# Altium PCB X-DO10 RFID_V1.0..PcbDoc (part 1 of 3)
Units mm, origin at the board's own origin, x right, y up, seen from the top; angles counter-clockwise.
Board outline 1582.55 x 1344.17 mm, 2 copper layers (Top Layer, Bottom Layer); 182 components, 148 nets, 511 pads, 172 vias.
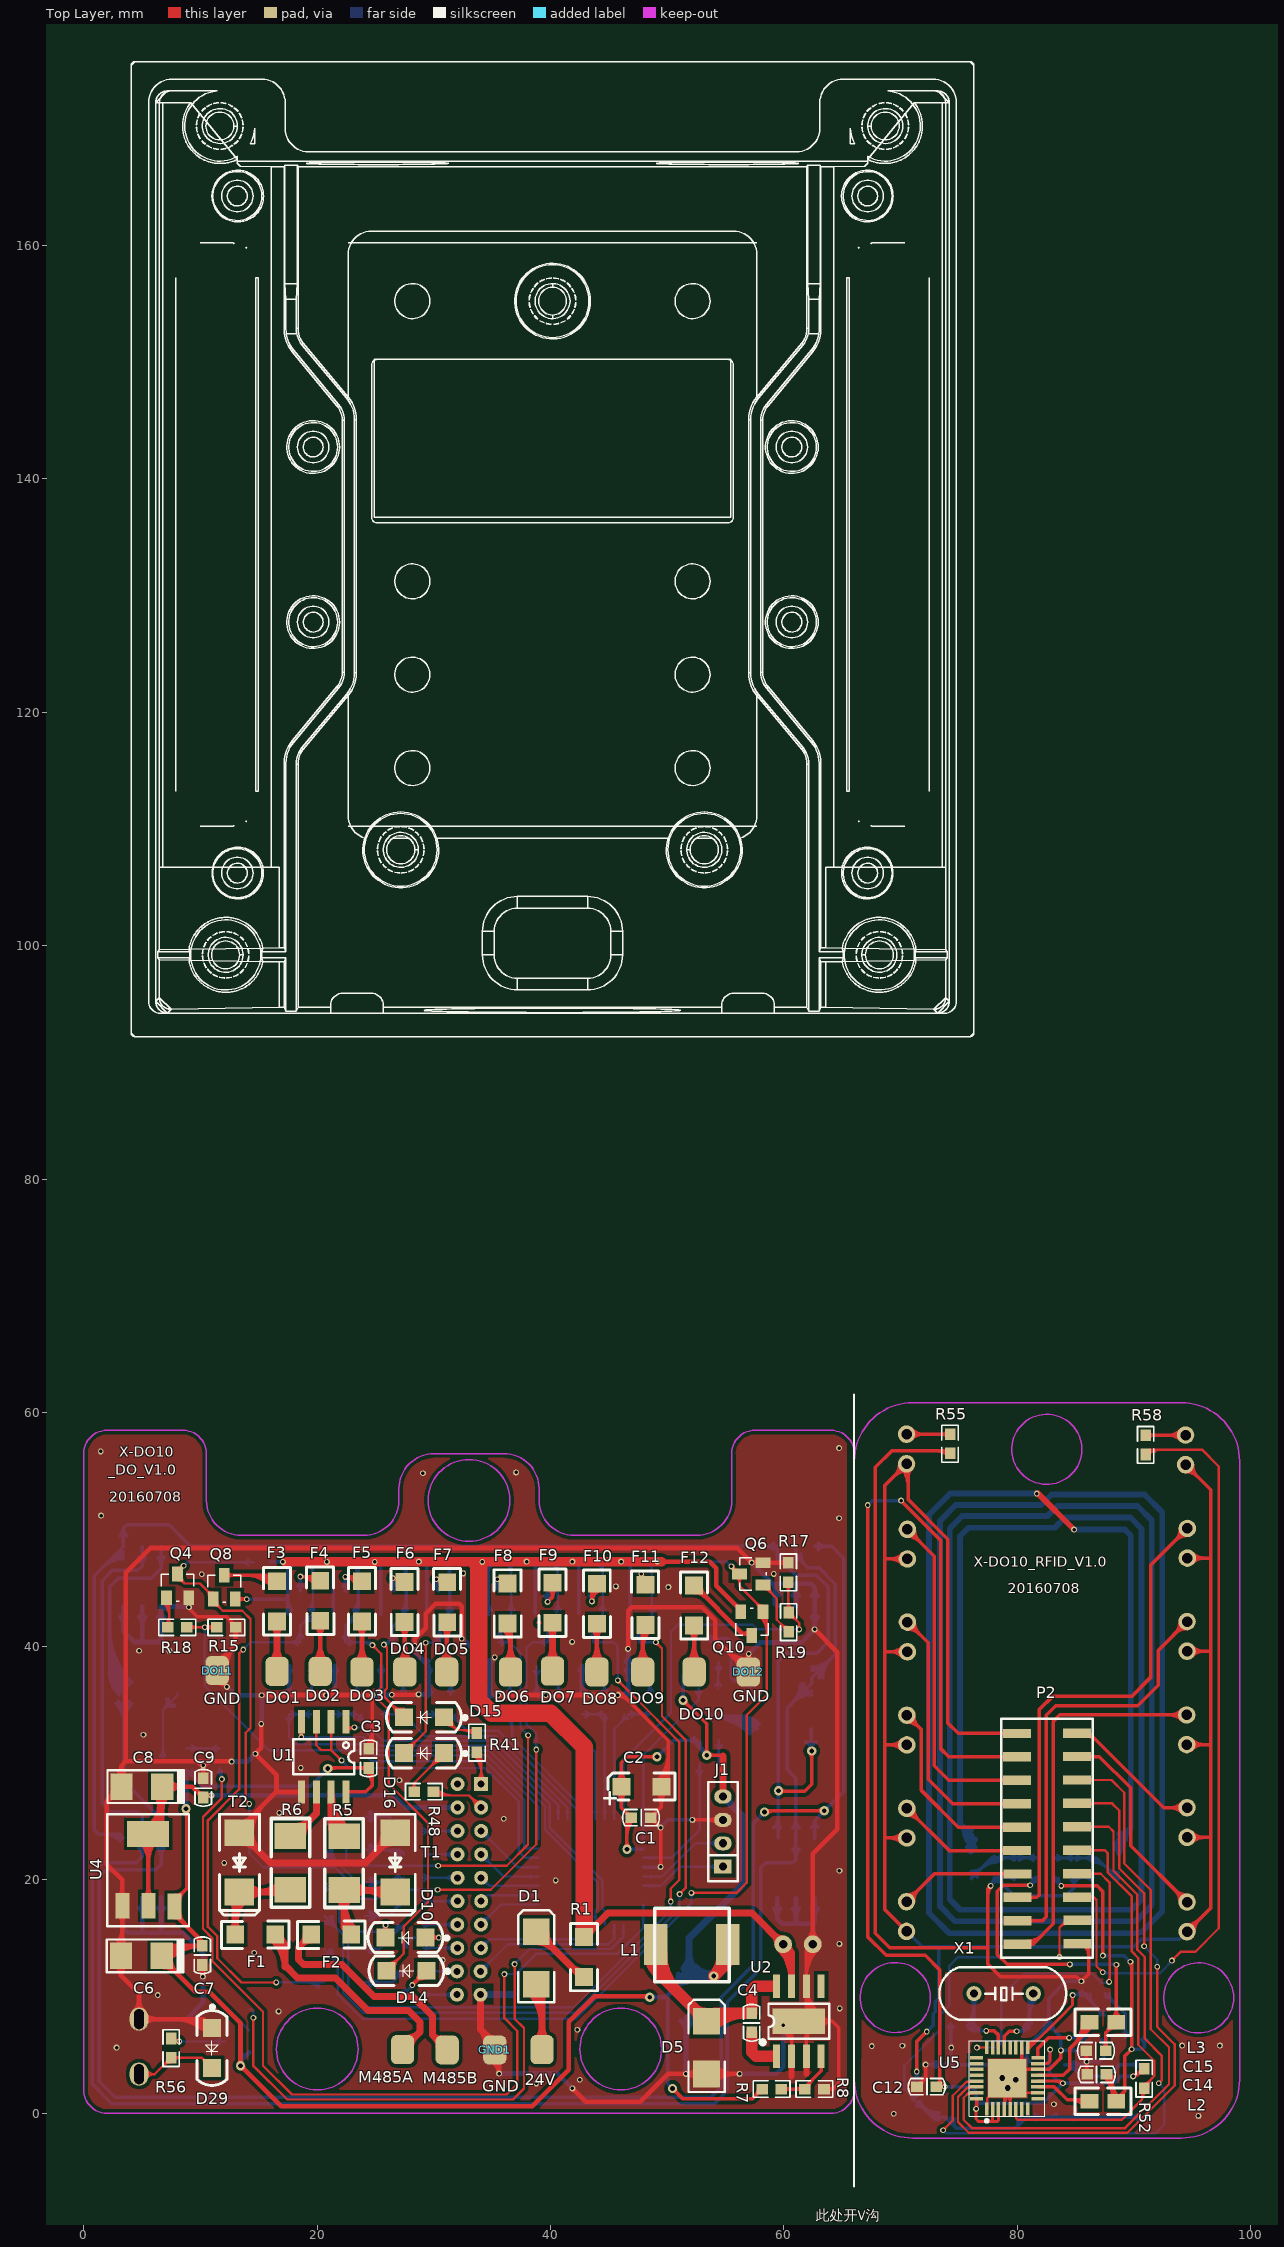
[diagram p0: Top Layer view]
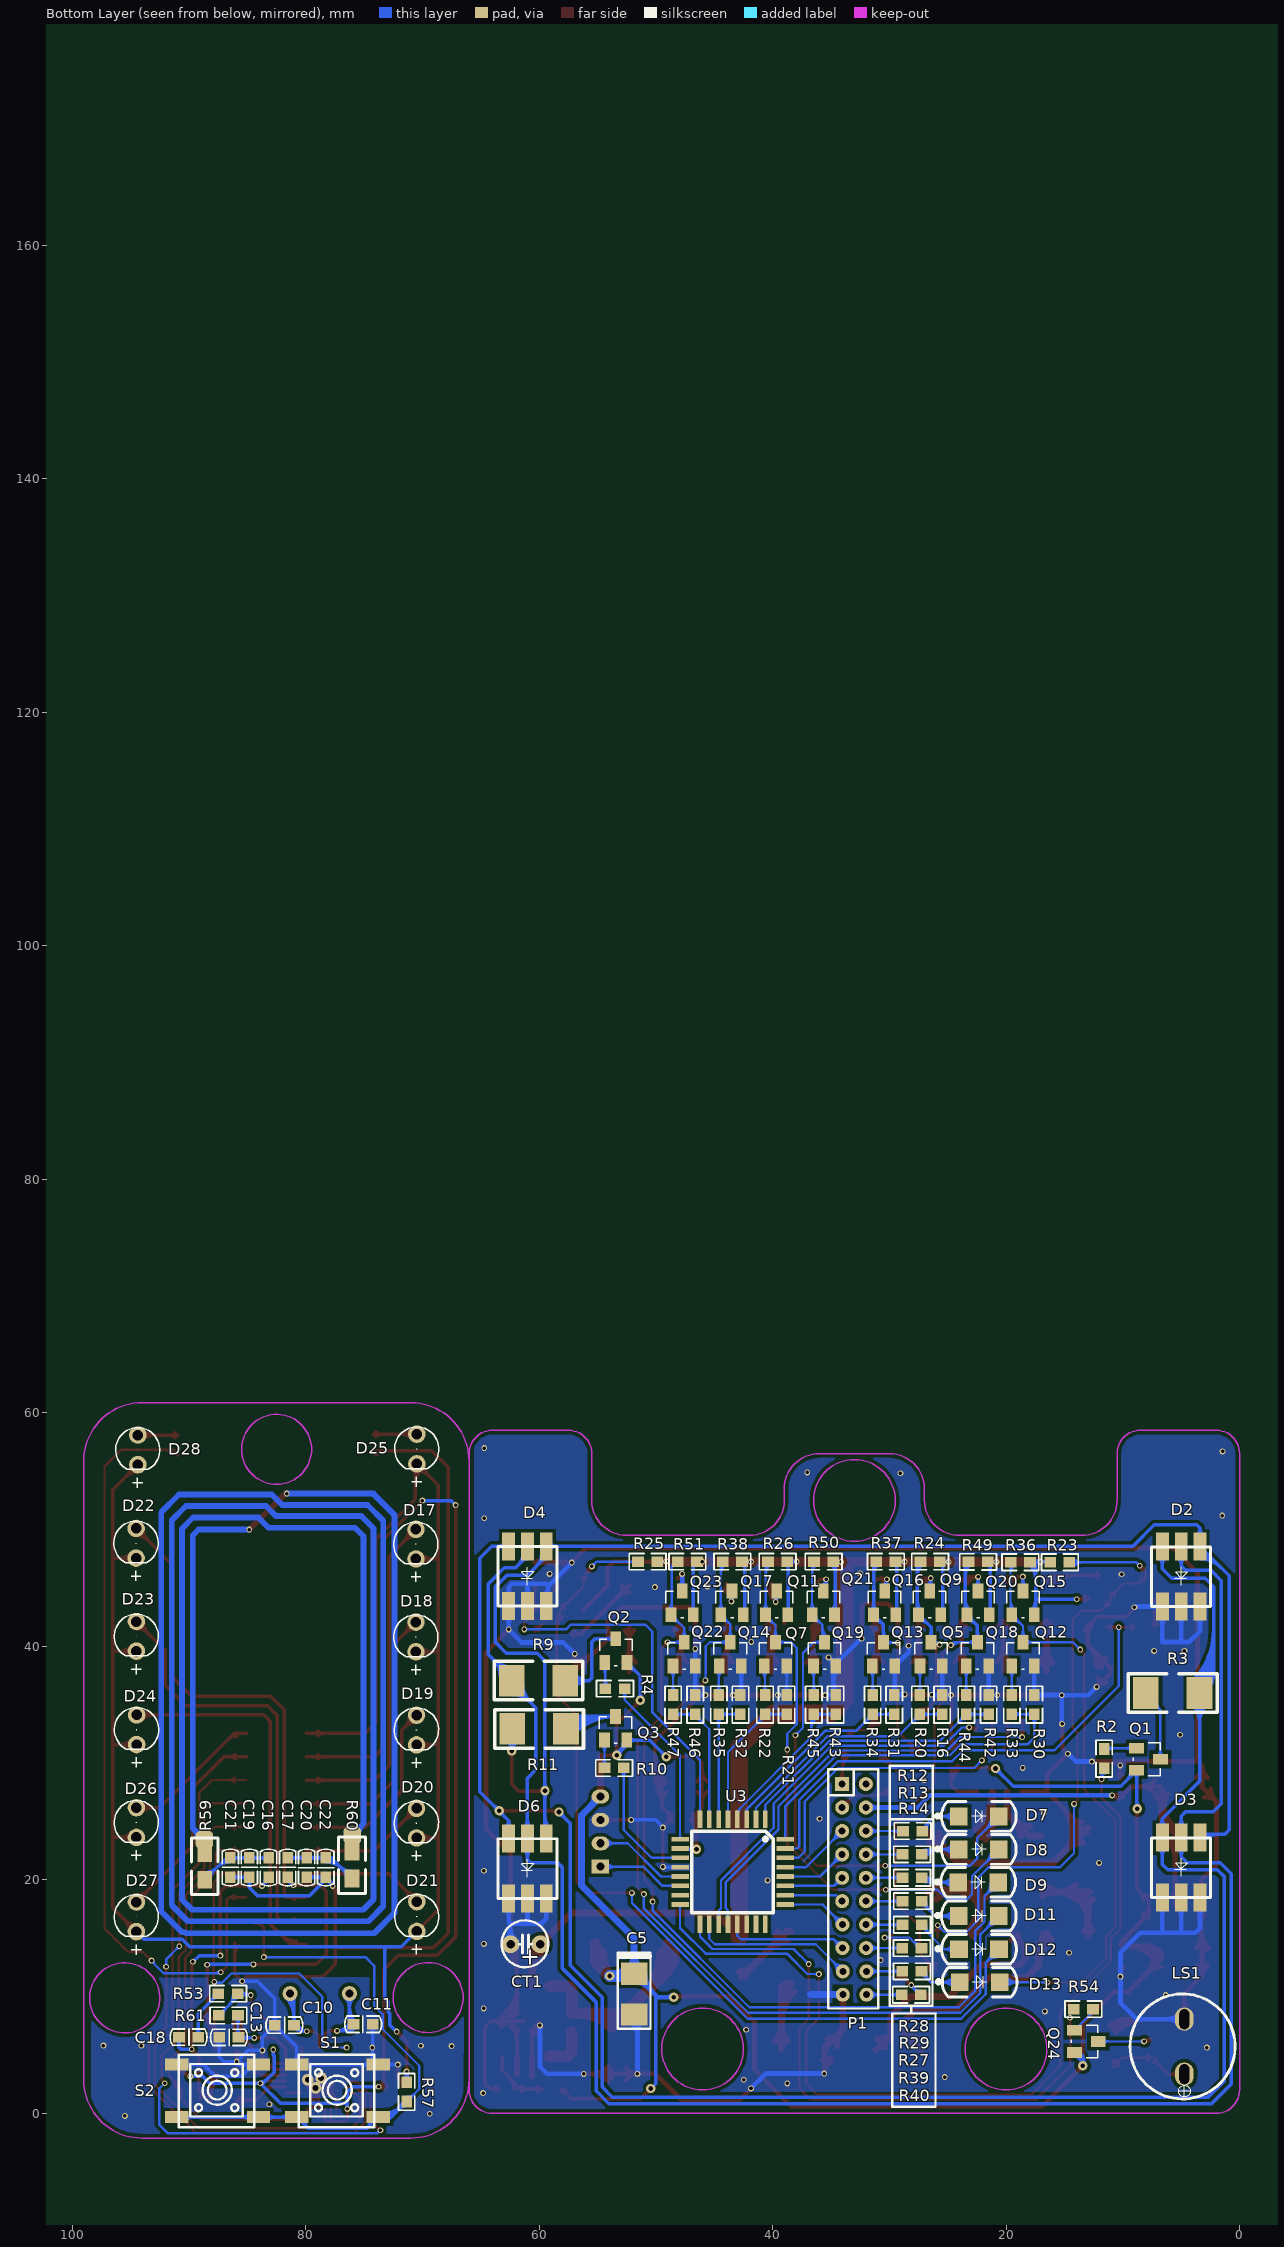
[diagram p1: Bottom Layer view, seen from below]

## Layer stack, top to bottom
Top Layer: signal copper 0.0356
Dielectric: dielectric 0.32, FR-4, Dk 4.8
Bottom Layer: signal copper 0.0356

## Board outline
-703.671,470.988 871.129,470.988 873.034,472.893 873.034,-867.465 874.939,-869.37 -705.703,-869.37 -707.608,-871.275

## Design rules (kind name [scope] priority, off if disabled: settings)
Clearance Clearance_GND [inpolygon] p1: gap=0.3
Clearance [All] p2: gap=0.2
PlaneClearance [All] p1: clearance=0.3
PolygonConnect [Isvia or Ispad] p1: connectstyle=Direct reliefconductorwidth=0.254 reliefentries=4 polygonreliefangle="90 Angle" airgapwidth=0.254
RoutingVias [All] p1: holewidth=0.3 width=0.5 viastyle="Through Hole" minholewidth=0.3 minwidth=0.5 maxholewidth=0.4 maxwidth=0.8
SilkToSolderMaskClearance SilkscreenOverComponentPads [IsPad] p1: minsilkscreentomaskgap=0.254 clearancetoexposedcopper=TRUE
SolderMaskExpansion [All] p1: expansion=0.102
Width [All] p1: maxlimit=1.5 minlimit=0.2 preferedwidth=0.2 minimp=50.000000 maximp=50.000000 favimp=50.000000
26 further rules are at their usual default settings.

## Classes and differential pairs
component class X-DO10_V1.0: 24V C1 C2 C3 C4 C5 C6 C7 C8 C9 CT1 D1 D2 D3 D4 D5 D6 D7 D8 D9 D10 D11 D12 D13 D14 D15 D16 D29 DO1 DO2 DO3 DO4 DO5 DO6 DO7 DO8 DO9 DO10 DO11 DO12 F1 F2 F3 F4 F5 F6 F7 F8 F9 F10 F11 F12 GND1 J1 L1 LS1 M485A M485B P1 Q1 Q2 Q3 Q4 Q5 Q6 Q7 Q8 Q9 Q10 Q11 Q12 Q13 Q14 Q15 Q16 Q17 Q18 Q19 Q20 Q21 Q22 Q23 Q24 R1 R2 R3 R4 R5 R6 R7 R8 R9 R10 R11 R12 R13 R14 R15 R16 R17 R18 R19 R20 R21 R22 R23 R24 R25 R26 R27 R28 R29 R30 R31 R32 R33 R34 R35 R36 R37 R38 R39 R40 R41 R42 R43 R44 R45 R46 R47 R48 R49 R50 R51 R56 R61 RD T1 T2 TD U1 U2 U3 U4
component class "X-DO10 RFID_LED_V1.0": C10 C11 C12 C13 C14 C15 C16 C17 C18 C19 C20 C21 C22 D17 D18 D19 D20 D21 D22 D23 D24 D25 D26 D27 D28 L2 L3 P2 R52 R53 R55 R57 R58 R59 R60 R61 S1 S2 U5 X1

## Components (designator, comment, footprint, x,y, rotation, side; value= is the part's Value field where it differs from the comment)
24V "焊盘" HOLE_SMD#1 39.275,5.45 r90 top (schematic designator 1)
C1 "" C0603 48.575,25.325 r180 top
C2 "" 1206C 46.075,27.975 r0 top
C3 "" C0603 24.425,31.225 r270 top
C4 "" C0603 57.225,6.925 r90 top
C5 "钽电容" CT3528 51.9,10.25 r270 bottom
C6 "33uF/16V" CT3528 5,13.5 r180 top
C7 "0.1uF" C0603 10.175,14.35 r270 top
C8 "33uF/16V" CT3528 5.05,28 r180 top
C9 "0.1uF" C0603 10.25,27.05 r90 top
C10 "15P" c0603 81.025,7.55 r0 bottom
C11 "15P" c0603 75.925,7.625 r180 bottom
C12 "104" c0603 73.05,2.275 r180 top
C13 "104" c0603 85.775,6.5 r0 bottom
C14 "47P" c0603 85.975,3.325 r0 top
C15 "47P" c0603 85.9,5.35 r0 top
C16 "15P" c0603 83.205,21.875 r270 bottom
C17 "15P" c0603 81.57,21.875 r270 bottom
C18 "104" c0603 89.225,6.525 r0 bottom
C19 "150P" c0603 84.84,21.875 r270 bottom
C20 "180P" c0603 79.935,20.225 r90 bottom
C21 "150P" c0603 86.475,21.875 r270 bottom
C22 "180P" c0603 78.3,20.225 r90 bottom
CT1 "铝电解电容" RB0.1 59.925,14.475 r0 bottom
D1 "" SMB 38.775,13.3 r90 top
D2 "5050RGB" 5050RGB 5.025,45.975 r90 bottom locked
D3 "5050RGB" 5050RGB 5.025,21.05 r90 bottom locked
D4 "5050RGB" 5050RGB 61.025,46 r90 bottom locked
D5 "" SMB 53.375,5.625 r90 top
D6 "5050RGB" 5050RGB 61.025,20.975 r90 bottom locked
D7 "" 1206d 24.075,25.425 r180 bottom
D8 "" 1206d 24.075,22.6 r180 bottom
D9 "" 1206d 24.125,19.775 r180 bottom
D10 "" 1206d 29.3,15.05 r180 top
D11 "" 1206d 24.075,16.9 r180 bottom
D12 "" 1206d 24.05,14.05 r180 bottom
D13 "" 1206d 24,11.225 r180 bottom
D14 "" 1206d 29.375,12.2 r180 top
D15 "" 1206d 30.875,33.925 r180 top
D16 "" 1206D 30.875,30.85 r180 top
D17 "黄色" LED-2.54-3 70.575,48.75 r90 bottom locked
D18 "黄色" LED-2.54-3 70.575,40.8 r90 bottom locked
D19 "黄色" LED-2.54-3 70.525,32.825 r90 bottom locked
D20 "黄色" LED-2.54-3 70.525,24.85 r90 bottom locked
D21 "黄色" LED-2.54-3 70.5,16.85 r90 bottom locked
D22 "黄色" LED-2.54-3 94.55,48.825 r90 bottom locked
D23 "黄色" LED-2.54-3 94.525,40.85 r90 bottom locked
D24 "黄色" LED-2.54-3 94.5,32.85 r90 bottom locked
D25 "红色" LED-2.54-3 70.5,56.9 r90 bottom locked
D26 "黄色" LED-2.54-3 94.525,24.9 r90 bottom locked
D27 "黄色" LED-2.54-3 94.525,16.825 r90 bottom locked
D28 "红色" LED-2.54-3 94.4,56.825 r90 bottom locked
D29 "4148" 1206D 11,7.3 r270 top
DO1 "焊盘" HOLE_SMD#2 16.575,37.85 r0 top
DO2 "焊盘" HOLE_SMD#1 20.275,37.85 r90 top
DO3 "焊盘" HOLE_SMD#1 23.85,37.8 r90 top
DO4 "焊盘" HOLE_SMD#1 27.525,37.8 r90 top
DO5 "焊盘" HOLE_SMD#1 31.1,37.8 r90 top
DO6 "焊盘" HOLE_SMD#1 36.575,37.8 r90 top
DO7 "焊盘" HOLE_SMD#1 40.175,37.875 r90 top
DO8 "焊盘" HOLE_SMD#1 43.975,37.8 r90 top
DO9 "焊盘" HOLE_SMD#1 47.9,37.8 r90 top
DO10 "焊盘" HOLE_SMD#1 52.3,37.8 r90 top
DO11 "GND" HOLE_SMD#2 11.45,37.925 r0 top
DO12 "GND" HOLE_SMD#2 56.95,37.8 r0 top (schematic designator DO9)
F1 "FSMD012-1206-R" 1206 14.7,15.3 r0 top
F2 "FSMD012-1206-R" 1206 21.225,15.3 r180 top
F3 "FSMD012-1206-R" 1206 16.575,43.85 r270 top
F4 "FSMD012-1206-R" 1206 20.275,43.9 r270 top
F5 "FSMD012-1206-R" 1206 23.85,43.85 r270 top
F6 "FSMD012-1206-R" 1206 27.5,43.8 r270 top
F7 "FSMD012-1206-R" 1206 31.15,43.775 r270 top
F8 "FSMD012-1206-R" 1206 36.325,43.675 r270 top
F9 "FSMD012-1206-R" 1206 40.175,43.725 r270 top
F10 "FSMD012-1206-R" 1206 43.975,43.65 r270 top
F11 "FSMD012-1206-R" 1206 48.125,43.55 r270 top
F12 "FSMD012-1206-R" 1206 52.3,43.5 r270 top
GND1 "GND" HOLE_SMD#1 35.225,5.425 r90 top
J1 "" SIP4-2.0 54.775,21.125 r90 top
L1 "" L-6X6 48.6,14.5 r0 top
L2 "2.2uH" r0805 87.325,1.025 r0 top
L3 "2.2uH" r0805 87.325,7.8 r0 top
LS1 "Bell" Bell_DIP_9mm 4.75,5.75 r90 bottom locked
M485A "焊盘" HOLE_SMD#1 27.325,5.45 r90 top (schematic designator M2)
M485B "焊盘" HOLE_SMD#1 31.15,5.425 r90 top (schematic designator M1)
P1 "Header 10X2A" "DIP2.0 2*10" 33.025,19.175 r180 bottom locked
P2 "Header 10X2A" "SMT2.0  2*10" 82.55,23.525 r0 top locked
Q1 "S8550" SOT-23 7.85,30.325 r270 bottom
Q2 "S8550" SOT-23 53.45,39.6 r180 bottom
Q3 "S8550" SOT-23 53.475,32.95 r180 bottom
Q4 "MMBT5551" SOT-23 8.05,45.15 r0 top
Q5 "MMBT5551" SOT-23 26.45,39.3 r180 bottom
Q6 "MMBT5551" SOT-23 57.225,46.2 r90 top
Q7 "MMBT5551" SOT-23 39.775,39.3 r180 bottom
Q8 "Si2309CDS" SOT-23 12.05,45.05 r0 top
Q9 "Si2309CDS" SOT-23 26.575,43.7 r180 bottom
Q10 "Si2309CDS" SOT-23 57.25,41.975 r180 top
Q11 "Si2309CDS" SOT-23 39.675,43.7 r180 bottom
Q12 "MMBT5551" SOT-23 18.575,39.3 r180 bottom
Q13 "MMBT5551" SOT-23 30.525,39.3 r180 bottom
Q14 "MMBT5551" SOT-23 43.65,39.3 r180 bottom
Q15 "Si2309CDS" SOT-23 18.575,43.7 r180 bottom
Q16 "Si2309CDS" SOT-23 30.425,43.7 r180 bottom
Q17 "Si2309CDS" SOT-23 43.5,43.7 r180 bottom
Q18 "MMBT5551" SOT-23 22.475,39.3 r180 bottom
Q19 "MMBT5551" SOT-23 35.575,39.3 r180 bottom
Q20 "Si2309CDS" SOT-23 22.425,43.7 r180 bottom
Q21 "Si2309CDS" SOT-23 35.675,43.7 r180 bottom
Q22 "MMBT5551" SOT-23 47.6,39.3 r180 bottom
Q23 "Si2309CDS" SOT-23 47.775,43.7 r180 bottom
Q24 "S8550" SOT-23 13.175,6.15 r270 bottom
R1 "贴片电阻" 1206 42.875,13.375 r90 top
R2 "" R0603 11.625,29.55 r90 bottom
R3 "" 2010 5.75,36 r0 bottom
R4 "" R0603 52.7,36.375 r0 bottom
R5 "" 2010 22.325,21.425 r90 top
R6 "" 2010 17.725,21.45 r90 top
R7 "" R0603 59.775,2.075 r180 top
R8 "" R0603 63.425,2.075 r180 top
R9 "" 2010 60.075,37.05 r180 bottom
R10 "" R0603 52.775,29.575 r0 bottom
R11 "" 2010 60.025,32.925 r180 bottom
R12 "" r0603 27.2,24.175 r0 bottom
R13 "" r0603 27.25,22.175 r0 bottom
R14 "" R0603 27.25,20.175 r0 bottom
R15 "贴片电阻" R0603 11.4,41.625 r0 top
R16 "贴片电阻" R0603 25.5,34.175 r90 bottom
R17 "贴片电阻" R0603 60.375,45.5 r90 top
R18 "贴片电阻" R0603 7.2,41.625 r0 top
R19 "贴片电阻" R0603 60.4,41.25 r90 top
R20 "贴片电阻" R0603 27.4,34.175 r90 bottom
R21 "贴片电阻" R0603 38.825,34.175 r90 bottom
R22 "贴片电阻" R0603 40.675,35.825 r270 bottom
R23 "贴片电阻" R0603 16.25,47.2 r180 bottom
R24 "贴片电阻" R0603 25.7,47.25 r0 bottom
R25 "贴片电阻" R0603 49.9,47.25 r0 bottom
R26 "贴片电阻" R0603 38.775,47.25 r0 bottom
R27 "" r0603 27.275,14.15 r0 bottom
R28 "" r0603 27.25,18.175 r0 bottom
R29 "" r0603 27.25,16.15 r0 bottom
R30 "贴片电阻" R0603 17.6,34.175 r90 bottom
R31 "贴片电阻" R0603 29.6,34.175 r90 bottom
R32 "贴片电阻" R0603 42.775,34.175 r90 bottom
R33 "贴片电阻" R0603 19.525,35.825 r270 bottom
R34 "贴片电阻" R0603 31.45,35.825 r270 bottom
R35 "贴片电阻" R0603 44.625,35.825 r270 bottom
R36 "贴片电阻" R0603 17.975,47.2 r0 bottom
R37 "贴片电阻" R0603 29.5,47.25 r0 bottom
R38 "贴片电阻" R0603 42.65,47.25 r0 bottom
R39 "" R0603 27.275,12.15 r0 bottom
R40 "" r0603 27.325,10.15 r0 bottom
R41 "" r0603 33.7,32.575 r270 top
R42 "贴片电阻" R0603 21.525,34.175 r90 bottom
R43 "贴片电阻" R0603 34.625,34.175 r90 bottom
R44 "贴片电阻" R0603 23.425,35.825 r270 bottom
R45 "贴片电阻" R0603 36.5,35.825 r270 bottom
R46 "贴片电阻" R0603 46.65,34.175 r90 bottom
R47 "贴片电阻" R0603 48.55,35.825 r270 bottom
R48 "" r0603 28.325,27.55 r0 top
R49 "贴片电阻" R0603 21.6,47.225 r0 bottom
R50 "贴片电阻" R0603 34.825,47.25 r0 bottom
R51 "贴片电阻" R0603 46.5,47.25 r0 bottom
R52 "470K" R0603 90.85,2.15 r90 top
R53 "820" r0603 85.85,10.25 r0 bottom
R54 "" R0603 14.225,8.925 r180 bottom (schematic designator 54)
R55 "贴片电阻" R0603 74.225,56.525 r90 top
R56 "0603" R0603 7.5,4.75 r90 top
R57 "" R0603 71.375,2.65 r270 bottom
R58 "" R0603 90.975,56.425 r90 top
R59 "?" R0805 88.675,21.15 r90 bottom
R60 "?" R0805 76.05,21.25 r90 bottom
R61 "5.1K" r0603 85.825,8.375 r0 bottom
S1 "TS1102W" TS1102W 77.325,1.975 r0 bottom locked
S2 "TS1102W" TS1102W 87.6,1.975 r0 bottom locked
T1 "SMBJ6.0CA" HSMA 26.7,24.025 r270 top
T2 "SMBJ6.0CA" HSMA 13.35,24.025 r270 top
U1 "MAX_485" SO-1.27-8/4.0 22.475,33.525 r180 top locked
U2 "LM22674" SO-1.27-9/4.0 59.375,4.875 r0 top
U3 "STC15W1K16S" LQFP-0.8-32/9X9 40.65,25.175 r0 bottom locked
U4 "AS1117" 1117 5.55,17.775 r90 top
U5 "MF522" QFN50P500X500X100-32N 79.125,3 r90 top locked
X1 "27.12M" 49US 76.275,10.25 r0 top

## Footprints (in the part's own frame and the unit in brackets; to place one, negate y for a bottom-side part, rotate by r counter-clockwise, add the part's x,y. Pads: shape width x height; smd on the part's side, far side on the other; paste and mask are expansions set on the pad)
49US [mm]
  round 1.3 hole 0.7: 1(0,0) 2(5.08,0)
  silkscreen extent -2.95,-2.25 7.9,2.25
1117 [mm]
  rect 2.2x1.2 smd: 1(-0.008,2.235) 2(-0.008,0) 3(-0.059,-2.261)
  rect 2.2x3.6 smd: 4(6.141,0.011)
  silkscreen extent -1.76,-3.49 7.84,3.51
1206 [mil]
  rect 60x60 smd: 1(-67.5,0) 2(67.5,0)
  silkscreen extent -114,-46 114,46
1206C [mil]
  rect 60x60 smd: 1(0,0) 2(135,0)
  silkscreen extent -59,-59 181,46
1206d [mil]
  rect 60x60 smd: 1(0,0) 2(135,0)
  silkscreen extent -72,-50 194,50
1206D [mil]
  rect 60x60 smd: 1(0,0) 2(135,0)
  silkscreen extent -72,-50 194,50
2010 [mm]
  rect 2.2x2.7 smd: 1(-2.3,0) 2(2.3,0)
  silkscreen extent -3.8,-1.64 3.8,1.66
5050RGB [mm]
  rect 2.4x1.1 smd: 1(-2.565,1.613) 2(-2.565,0) 3(-2.565,-1.613) 4(2.565,-1.613) 5(2.565,0) 6(2.565,1.613)
  silkscreen extent -2.56,-2.53 2.54,2.53
Bell_DIP_9mm [mm] "直径9mm"
  oval 2x1.6 hole 0.85 slot 1.7 at 0 deg: 1(2.311,0) 2(-2.4,0)
  silkscreen extent -4.52,-4.34 4.47,4.65
C0603 [mm]
  rect 1x0.9 smd: 1(0,0) 2(1.65,0)
  silkscreen extent -0.75,-0.7 2.4,0.7
c0603 [mm]
  rect 1x0.9 smd: 1(0,0) 2(1.65,0)
  silkscreen extent -0.75,-0.7 2.4,0.7
CT3528 [mil]
  rect 75x90 smd: 1(-66.85,0.75) 2(70.94,0.75)
  silkscreen extent -139,-54 118,56
"DIP2.0 2*10" [mm]
  rect 1.2x1.2 hole 0.6: 1(-1.038,9.023)
  round 1.2 hole 0.6: 2(-1.038,7.017) 3(-1.038,5.01) 4(-1.038,3.003) 5(-1.038,0.997) 6(-1.038,-1.01) 7(-1.012,-3.016) 8(-1.012,-5.023) 9(-0.987,-7.016) 10(-0.987,-9.023) 11(0.987,9.023) 12(0.987,7.017) 13(0.987,5.01) 14(0.987,3.003) 15(0.987,0.997) 16(0.987,-1.01) 17(1.013,-3.016) 18(1.013,-5.023) 19(1.038,-7.016) 20(1.038,-9.023)
  silkscreen extent -2.23,-10.2 2.05,10.29
HOLE_SMD#1 [mm]
  rrect50% 2.5x2 smd: 1(0,0)
HOLE_SMD#2 [mm]
  rrect50% 2x2.5 smd: 1(0,0)
HSMA [mil]
  rect 90x100 smd: 1(0,0) 2(200,0)
  silkscreen extent -63,-68 278,68
L-6X6 [mm]
  rect 2x3.5 smd: 1(0.403,-0.033) 2(6.571,-0.033)
  silkscreen extent 0.33,-3.25 6.69,3.08
LED-2.54-3 [mm]
  round 1.5 hole 0.9: 1(-1.27,0) 2(1.27,0)
  silkscreen extent -3.23,-1.88 1.9,1.9
LQFP-0.8-32/9X9 [mm]
  rect 0.4x1.5 smd: 1(0,0) 2(0.8,0) 3(1.6,0) 4(2.4,0) 5(3.2,0) 6(4,0) 7(4.8,0) 8(5.6,0) 17(5.6,9) 18(4.8,9) 19(4,9) 20(3.2,9) 21(2.4,9) 22(1.6,9) 23(0.8,9) 24(0,9)
  rect 1.5x0.4 smd: 9(7.3,1.7) 10(7.3,2.5) 11(7.3,3.3) 12(7.3,4.1) 13(7.3,4.9) 14(7.3,5.7) 15(7.3,6.5) 16(7.3,7.3) 25(-1.7,7.3) 26(-1.7,6.5) 27(-1.7,5.7) 28(-1.7,4.9) 29(-1.7,4.1) 30(-1.7,3.3) 31(-1.7,2.5) 32(-1.7,1.7)
  silkscreen extent -0.7,1 6.3,8
QFN50P500X500X100-32N [mm] "QFN, 32-Leads, Body 5.1x5.1mm (max), Pitch 0.50mm, IPC Medium Density"
  rect 1.1x0.3 smd: 1(-2.625,1.75) 8(-2.625,-1.75) 17(2.625,-1.75) 24(2.625,1.75)
  rect 1.2x0.3 smd: 2(-2.625,1.25) 3(-2.625,0.75) 4(-2.625,0.25) 5(-2.625,-0.25) 6(-2.625,-0.75) 7(-2.625,-1.25) 18(2.625,-1.25) 19(2.625,-0.75) 20(2.625,-0.25) 21(2.625,0.25) 22(2.625,0.75) 23(2.625,1.25)
  rect 0.3x1.1 smd: 9(-1.75,-2.625) 16(1.75,-2.625) 25(1.75,2.625) 32(-1.75,2.625)
  rect 0.3x1.2 smd: 10(-1.25,-2.625) 11(-0.75,-2.625) 12(-0.25,-2.625) 13(0.25,-2.625) 14(0.75,-2.625) 15(1.25,-2.625) 26(1.25,2.625) 27(0.75,2.625) 28(0.25,2.625) 29(-0.25,2.625) 30(-0.75,2.625) 31(-1.25,2.625)
  rect 3.3x3.3 smd: 33(0,0)
  silkscreen extent -3.77,-3.22 3.22,3.25
R0603 [mm]
  rect 1x0.9 smd: 1(0,0) 2(1.65,0)
  silkscreen extent -0.75,-0.7 2.4,0.7
r0603 [mm]
  rect 1x0.9 smd: 1(0,0) 2(1.65,0)
  silkscreen extent -0.75,-0.7 2.4,0.7
r0805 [mil]
  rect 60x50 smd: 1(-45,0) 2(45,0)
  silkscreen extent -95,-45 95,45
R0805 [mil]
  rect 60x50 smd: 1(-45,0) 2(45,0)
  silkscreen extent -95,-45 95,45
RB0.1 [mil]
  round 60 hole 28: 1(0,0) 2(100,0)
  silkscreen extent -27,-81 131,77
SIP4-2.0 [mm]
  rect 1.2x1.5 hole 0.7 mask+0.1: 1(0,0)
  oval 1.2x1.5 hole 0.7 mask+0.1: 2(2,0) 3(4,0) 4(6,0)
  silkscreen extent -1.25,-1.25 7.25,1.25
SMB [mm] "DO-214-AA/SMB; 2 C-Bend Leads; Body 5.3 x 3.6 mm, inc. leads (LxW)"
  rect 2.3x2.3 smd: 1(-2.25,0) 2(2.25,0)
  silkscreen extent -3.8,-1.55 4.1,1.55
"SMT2.0  2*10" [mm]
  rect 2.4x0.8 smd: 1(-2.588,9.011) 2(-2.588,7.004) 3(-2.588,4.997) 4(-2.588,2.991) 5(-2.588,0.984) 6(-2.588,-1.022) 7(-2.562,-3.029) 8(-2.562,-5.036) 9(-2.537,-7.029) 10(-2.537,-9.036) 11(2.537,9.036) 12(2.537,7.029) 13(2.537,5.022) 14(2.537,3.016) 15(2.537,1.009) 16(2.537,-0.997) 17(2.563,-3.004) 18(2.563,-5.011) 19(2.588,-7.004) 20(2.588,-9.011)
  silkscreen extent -3.95,-10.21 3.9,10.28
SO-1.27-8/4.0 [mm]
  rect 0.6x2 smd: 1(0,0) 2(1.27,0) 3(2.54,0) 4(3.81,0) 5(3.81,6) 6(2.54,6) 7(1.27,6) 8(0,6)
  silkscreen extent -0.7,1.5 4.5,4.5
SO-1.27-9/4.0 [mm]
  rect 0.6x2 smd: 1(0,0) 2(1.27,0) 3(2.54,0) 4(3.81,0) 5(3.81,6) 6(2.54,6) 7(1.27,6) 8(0,6)
  rect 4.5x2.2 smd: 9(1.905,3)
  silkscreen extent -1.35,1.05 4.5,4.5
SOT-23 [mil]
  rect 36x50 smd: 1(-37.5,-39) 2(37.5,-39) 3(0,41)
  silkscreen extent -55,-50 55,40
TS1102W [mm]
  rect 2x1 smd: 1(-3.53,-2.2) 2(-3.53,2.3) 3(3.47,-2.2) 4(3.47,2.3)
  silkscreen extent -3.17,-3.05 3.3,3.17

## Part data
24V DO1 DO2 DO3 DO4 DO5 DO6 DO7 DO8 DO9 DO10 DO11 DO12 GND1 M485A M485B: library part 焊?
C1 C3 C4: library part Cap, "Capacitor"
C2 C5 CT1: library part "Cap Pol1", "Polarized Capacitor (Radial)"
C6 C8: library part "CAPACITOR POL", "Capacitor"
C7 C9 C10 C11 C12 C13 C14 C15 C16 C17 C18 C19 C20 C21 C22: library part CAP, "Capacitor"
D1 D7 D8 D9 D10 D11 D12 D13 D14 D15 D16 D29: library part Diode, "Default Diode"
D5: library part SMBJ6.0CA
D17 D18 D19 D20 D21 D22 D23 D24 D25 D26 D27 D28: library part LED0, "Typical INFRARED GaAs LED"
F1 F2 F3 F4 F5 F6 F7 F8 F9 F10 F11 F12: library part "Fuse 2", "Fuse"
J1: library part "Header 4"
L1: library part 电?
L2 L3: library part INDUCTOR1
LS1: "Electrical Bell"
P1 P2: "Header, 10-Pin, Dual row"
Q4 Q5 Q6 Q7 Q12 Q13 Q14 Q18 Q19 Q22: library part NPN, "NPN Bipolar Transistor"
Q8 Q9 Q10 Q11 Q15 Q16 Q17 Q20 Q21 Q23: library part P-MOSFET
R1 R2 R3 R4 R5 R6 R7 R8 R9 R10 R11 R15 R16 R17 R18 R19 R20 R21 R22 R23 R24 R25 R26 R30 R31 R32 R33 R34 R35 R36 R37 R38 R42 R43 R44 R45 R46 R47 R49 R50 R51 R52 R53 R54 R55 R56 R57 R58 R59 R60 R61: library part "Res Semi", "Semiconductor Resistor"
R12 R13 R14 R27 R28 R29 R39 R40 R41 R48: library part "Res Semi", "贴片?"
U2: library part 2674
U5: library part MF522B
X1: library part Tm08B.S01_12M_42

## Free pads (board coordinates)
  round 1 hole 0.5: 0(78.7,3.025) 0(79.175,2.175) 0(79.85,2.875)
  rrect50% 1.5x1.5 smd far side: 1(76.025,23.8) 2(88.7,23.425)

## Via types
v1: diameter 0.5, hole 0.3, Top Layer to Bottom Layer, 158 vias
v2: diameter 0.8, hole 0.4, Top Layer to Bottom Layer, 14 vias

## Nets (pads, with @x,y where several pads share a name; then routed paths per layer and width w, separated by ;. In a path a pad name is that pad's centre, name@x,y a point inside that pad or via, vN(x,y) a via of type N, cw(c..) or ccw(c..) an arc to the next point about the centre after c; other vN are vias at no path point)
3V3: C8.1 C9.1 P1.12 U4.2 U4.4 | length 63.4
  Top Layer w0.4: U4.4@4.902,23.28 cw(c3.338,21.716) 5.55,21.716 ; U4.4@5.185,23.563 cw(c4.304,22.682) 5.55,22.682 ; U4.2@5.267,18.55 ccw(c4.585,19.233) 5.55,19.233 ccw(c6.516,19.233) U4.2@5.833,18.55 ; U4.2@5.55,17.767 5.55,23.905 6.748,25.103 C8.1@6.748,27.981 9.319,27.981 C9.1@10.25,27.05 10.425,27.225 v1(10.95,27.225) ccw(c10.95,26.634) C9.1@10.458,26.962 ; 5.55,21.771 cw(c7.684,21.771) U4.4@6.175,23.28 ; 5.55,22.737 cw(c6.718,22.737) U4.4@5.892,23.563 ; U4.4@5.602,24.553 ccw(c2.837,27.318) C8.1@6.748,27.318 ; U4.4@5.885,24.27 ccw(c3.802,26.353) 6.748,26.353 ; C8.1@6.135,27.354 cw(c4.638,26.286) 6.434,25.891 ; U4.4@6.168,23.987 ccw(c4.768,25.387) 6.748,25.387 ; C8.1@6.216,27.258 cw(c4.931,25.974) 6.748,25.974 cw(c8.565,25.974) C8.1@7.28,27.258 ; U4.4@6.239,24.816 ccw(c6.239,25.354) U4.4@6.619,24.974 ; C8.1@6.461,27.586 cw(c5.626,26.991) 6.627,26.77 ; 6.509,26.234 cw(c7.945,25.918) C8.1@7.153,27.156 ; C8.1@7.28,27.449 cw(c8.565,26.164) 8.565,27.981 cw(c8.565,29.798) C8.1@7.28,28.513 ; 9.738,27.562 ccw(c10.25,28.074) C9.1@10.25,27.35 ; C9.1@9.859,27.441 cw(c9.517,27.1) C9.1@10,27.1
  Bottom Layer w0.4: v1(10.95,27.225) 11.1,27.225 11.125,27.25 26.55,27.25 27.608,26.192 P1.12@32.038,26.192 ; P1.12@31.755,25.909 ccw(c31.072,25.226) 31.072,26.192 ccw(c31.072,27.157) P1.12@31.755,26.474
3V3_R: C12.1 P2.2 R52.2 U5.2 U5.3 U5.12 U5.15 U5.32 | length 128.4
  Top Layer w0.254: v1@76.363,0.288 cw(c76.153,0.078) 76.45,0.078 cw(c76.747,0.078) v1@76.537,0.288 ; v1(76.45,0.375) 76.45,-0.5 76.675,-0.725 77.825,-0.725 ; U5.2@77.875,0.375 77.875,-0.675 77.825,-0.725 ; U5.3@78.375,0.375 78.375,-0.6 78.25,-0.725 77.825,-0.725 ; U5.12@81.75,2.75 83.725,2.75 v1(83.9,2.575) ; U5.15@81.75,4.25 82.55,4.25 82.8,4.5 v1(82.8,5.45) ; v1@82.713,5.363 cw(c82.503,5.153) 82.8,5.153 cw(c83.097,5.153) v1@82.887,5.363 ; 83.181,2.75 cw(c83.181,1.856) v1@83.813,2.488
  Top Layer w0.3: v1(67.175,52.1) 67.175,15.1 68.75,13.525 72.1,13.525 73.35,12.275 73.35,2.575 C12.1@73.05,2.275 v1(73.775,2.275) ; v1(70.025,52.475) 73.45,49.05 73.45,31.2 74.121,30.529 P2.2@79.962,30.529 ; C12.1@73.138,2.438 ccw(c72.626,2.95) 73.35,2.95 ccw(c74.074,2.95) 73.562,2.438 ; C12.1@73.323,2.074 cw(c73.775,1.666) v1(73.775,2.275) ; C12.1@73.323,2.476 ccw(c73.775,2.884) v1(73.775,2.275) ; v1@76.379,0.446 ccw(c76.088,0.737) 76.5,0.737 ; v1@76.5,0.375 U5.32@76.5,1.25 ; P2.2@78.986,30.352 ccw(c78.559,29.925) 78.559,30.529 ccw(c78.559,31.133) P2.2@78.986,30.706 ; v1(89.9,3.15) v1@90.025,3.15 ; v1@89.9,3.25 ccw(c89.9,3.793) 90.284,3.409 ; v1@89.926,3.247 ccw(c90.044,3.686) 90.271,3.292 ; R52.2@90.675,3.8 v1@90.025,3.15 ; R52.2@90.829,3.451 ccw(c90.757,2.418) v1@90.025,3.15
  Bottom Layer w0.3: v1(67.175,52.1) 67.55,52.475 v1(70.025,52.475) ; v1(73.775,2.275) 76,2.275 76.45,1.825 v1(76.45,0.375) ; 76.45,0.85 82.175,0.85 v1(83.9,2.575) 88.275,2.575 88.85,3.15 v1(89.9,3.15) ; v1(82.8,5.45) 82.8,4.992 82.72,4.912 82.72,3.505 83.65,2.575 v1@83.675,2.575 ; 83.303,2.922 ccw(c83.9,3.52) v1@83.9,2.675
24V: CT1.1 Q8.2 Q9.2 Q10.2 Q11.2 Q15.2 Q16.2 Q17.2 Q20.2 Q21.2 Q23.2 R1.2 R23.1 R24.1 R25.1 R26.1 R36.1 R37.1 R38.1 R49.1 R50.1 R51.1 U2.7 | length 178.1
  Top Layer w0.3: Q8.2@13.002,44.059 13.037,44.025 v1(13.975,44.025) ; Q8.2@13.22,43.842 cw(c13.661,43.401) 13.661,44.025 ; Q8.2@13.22,44.277 ccw(c13.827,44.884) v1@13.827,44.025 ; 13.643,44.074 ccw(c13.739,44.434) v1@13.925,44.112 ; 33.825,46.9 v1(34.15,47.225)
  Top Layer w0.4: 49.525,47.25 53.625,47.25 54.2,46.675 54.2,45.2 Q10.2@56.298,43.102
  Top Layer w0.6: R1.2@42.875,15.089 44.936,17.15 57.25,17.15 CT1.1@59.925,14.475 60.645,13.755 ; R1.2@42.875,15.552 ccw(c42.875,16.667) 43.664,15.878 ccw(c44.452,15.089) R1.2@43.337,15.089 ; CT1.1@59.463,14.475 ccw(c58.348,14.475) 59.136,15.264 ccw(c59.925,16.052) CT1.1@59.925,14.937 ; CT1.1@59.598,14.148 cw(c57.071,11.621) U2.7@60.645,11.621 ; CT1.1@59.956,14.014 cw(c60.015,13.125) 60.645,13.755 ; CT1.1@60.023,14.573 cw(c58.52,13.07) 60.645,13.07 ; CT1.1@60.386,14.444 ccw(c61.275,14.385) 60.645,13.755 ; U2.7@60.645,10.875 60.645,13.755
  Top Layer w0.8: v1@17.25,47.25 v1(28.725,47.25) v1(37.95,47.25) v1(46.05,47.25) 49.525,47.25
  Top Layer w1.5: 33.825,46.9 33.85,46.9 33.85,35.375 34.95,34.275 40,34.275 42.875,31.4 R1.2@42.875,15.089
  Bottom Layer w0.3: v1(13.975,44.025) 17.475,44.025 ; R23.1@16,47.225 v1(17.075,47.225) v1@17.1,47.2 ; v1@17.132,47.307 ccw(c17.285,47.524) 17.353,47.268 ; v1@17.146,47.296 ccw(c17.377,47.527) 17.377,47.2 ; v1@17.162,47.275 ccw(c17.423,47.426) 17.345,47.134 ; Q15.2@17.405,43.104 ccw(c17.177,43.333) Q15.2@17.5,43.333 ; 17.5,43.925 ccw(c18.66,43.925) Q15.2@17.84,43.104 ; 17.5,45.812 cw(c19.163,45.812) R36.1@17.987,46.988 ; 17.5,46.536 cw(c18.439,46.536) R36.1@17.775,47.2 ; R36.1@17.552,46.999 ccw(c17.1,46.591) v1@17.1,47.2 ; R36.1@17.552,47.401 cw(c17.1,47.809) v1@17.1,47.2 ; Q15.2@17.623,42.709 17.5,42.832 17.5,46.875 17.825,47.2 v1@17.1,47.2 ; v1(20.85,47.225) R49.1@21.6,47.225 ; Q20.2@21.375,42.857 R49.1@21.375,47 ; R49.1@21.375,46.803 cw(c21.972,46.803) R49.1@21.55,47.225 ; v1(24.95,47.225) v1@24.975,47.25 ; v1@25.007,47.143 cw(c25.16,46.926) R24.1@25.228,47.182 ; v1@25.021,47.154 cw(c25.252,46.923) R24.1@25.252,47.25 ; v1@25.037,47.175 cw(c25.298,47.024) R24.1@25.22,47.316 ; R24.1@25.427,47.049 ccw(c24.975,46.641) v1@24.975,47.25 ; R24.1@25.427,47.451 cw(c24.975,47.859) v1@24.975,47.25 ; Q9.2@25.45,42.757 25.45,47 R24.1@25.7,47.25 v1@24.975,47.25 ; 25.45,46.767 cw(c26.133,46.767) R24.1@25.65,47.25 ; v1(28.725,47.25) R37.1@29.5,47.25 29.4,47.15 Q16.2@29.4,42.782 ; v1@34.205,47.141 cw(c34.336,46.941) R50.1@34.398,47.172 ; v1@34.221,47.154 cw(c34.452,46.923) R50.1@34.452,47.25 ; v1@34.237,47.175 cw(c34.46,47.046) R50.1@34.393,47.295 ; Q21.2@34.505,43.104 ccw(c34.156,43.454) 34.65,43.454 ; R50.1@34.518,47.405 cw(c34.2,47.596) v1@34.2,47.225 ; R50.1@34.523,47.088 ccw(c34.225,46.896) v1@34.225,47.25 ; R50.1@34.523,47.412 cw(c34.225,47.604) v1@34.225,47.25 ; R50.1@34.529,47.422 cw(c34.15,47.688) v1(34.15,47.225) ; R50.1@34.541,47.062 ccw(c34.2,46.786) v1@34.2,47.225 ; R50.1@34.554,47.047 ccw(c34.15,46.677) v1(34.15,47.225) ; 34.65,43.804 ccw(c35.639,43.804) Q21.2@34.94,43.104 ; 34.65,46.224 cw(c35.801,46.224) R50.1@34.987,47.038 ; Q21.2@34.723,42.709 34.65,42.782 34.65,47.075 R50.1@34.825,47.25 v1@34.225,47.25 ; v1(37.95,47.25) R26.1@38.775,47.25 38.7,47.175 Q11.2@38.7,42.782 ; v1@38,47.163 cw(c38.143,46.915) 38.217,47.192 ; v1@38,47.337 ccw(c38.143,47.584) 38.217,47.308 ; v1(41.875,47.25) R38.1@42.65,47.25 42.425,47.025 Q17.2@42.425,42.832 ; R38.1@42.388,47.038 ccw(c41.876,46.526) v1(41.875,47.25) ccw(c41.876,47.974) R38.1@42.388,47.462 ; R38.1@42.425,46.828 cw(c43.022,46.828) R38.1@42.6,47.25 ; v1(46.05,47.25) 46.9,47.25 46.818,47.168 46.818,42.855 Q23.2@46.672,42.709 ; v1(49.15,47.275) 49.175,47.25 R25.1@49.9,47.25 ; v1(34.15,47.225) v1@34.2,47.225 ; v1@34.2,47.225 v1@34.225,47.25
+5V: P1.11
BELL: R54.1 U3.17 | length 53.6
  Top Layer w0.2: v1@14.525,8.175 14.525,4.1 17.45,1.175 36.775,1.175 37.725,2.125 37.725,7.3 36.925,8.1 v1(36.925,12.775) ; v1@36.819,12.669 cw(c36.563,12.413) 36.925,12.413 cw(c37.287,12.413) v1@37.031,12.669
  Bottom Layer w0.2: R54.1@14.225,8.925 14.3,8.925 14.55,8.675 v1(14.55,8.175) ; v1(36.925,12.775) 38.225,14.075 45.175,14.075 46.25,15.15 U3.17@46.25,16.175 ; v1@36.925,12.925 ccw(c36.925,13.287) 37.181,13.031 ccw(c37.437,12.775) v1@37.075,12.775 ; U3.17@46.179,15.554 cw(c46.009,15.384) 46.25,15.384 cw(c46.491,15.384) U3.17@46.321,15.554
DO1: F3.1 Q8.3 | length 12.8
  Top Layer w0.3: Q8.3@12.05,46.091 16.048,46.091 F3.1@16.575,45.565 ; Q8.3@12.267,45.874 cw(c12.792,45.35) 12.792,46.091 cw(c12.792,46.833) Q8.3@12.267,46.309 ; 13.825,46.091 cw(c13.825,42.815) F3.1@16.142,45.132 ; 14.55,46.091 cw(c14.55,43.539) F3.1@16.354,45.344 ; 15.274,46.091 cw(c15.274,44.263) F3.1@16.567,45.556 ; F3.1@15.998,46.091 cw(c15.998,44.988) F3.1@16.779,45.768
DO2: F4.1 Q15.3 | length 6.8
  Top Layer w0.3: 19.099,45.975 cw(c19.099,44.923) F4.1@20.006,45.456 ; F4.1@19.747,45.304 ccw(c18.575,44.615) v1(18.575,45.975) 19.915,45.975 F4.1@20.275,45.615
  Bottom Layer w0.3: Q15.3@18.358,45.136 ccw(c17.833,45.661) 18.575,45.661 ccw(c19.317,45.661) Q15.3@18.792,45.136 ; Q15.3@18.575,44.741 v1(18.575,45.975)
DO3: F5.1 Q20.3 | length 6
  Top Layer w0.3: 22.854,45.95 cw(c22.854,45.202) F5.1@23.557,45.458 ; F5.1@23.275,45.355 ccw(c22.425,45.045) v1(22.425,45.95) 23.465,45.95 F5.1@23.85,45.565
  Bottom Layer w0.3: Q20.3@22.208,45.136 ccw(c21.683,45.661) 22.425,45.661 ccw(c23.167,45.661) Q20.3@22.642,45.136 ; Q20.3@22.425,44.741 v1(22.425,45.95)
DO4: F6.1 Q9.3 | length 4.6
  Top Layer w0.3: F6.1@26.8,45.85 cw(c26.8,45.459) F6.1@27.189,45.49 ; F6.1@26.89,45.466 ccw(c26.475,45.434) v1(26.475,45.85) 27.165,45.85 F6.1@27.5,45.515
  Bottom Layer w0.3: Q9.3@26.358,45.136 ccw(c26.075,45.419) 26.475,45.419 ; Q9.3@26.575,44.741 26.475,44.841 v1(26.475,45.85) ccw(c27.435,45.85) Q9.3@26.783,45.145
DO5: F7.1 Q16.3 | length 4.2
  Top Layer w0.3: v1@30.275,45.837 ccw(c30.429,46.104) F7.1@30.509,45.806 ; v1@30.301,45.75 ccw(c30.301,46.338) F7.1@30.717,45.922 ; F7.1@30.539,45.454 ccw(c30.225,45.435) v1(30.225,45.75) 31.09,45.75 F7.1@31.35,45.49
  Bottom Layer w0.3: Q16.3@30.425,44.741 30.225,44.941 v1(30.225,45.75) ccw(c30.852,45.75) Q16.3@30.565,45.192
DO6: F8.1 Q21.3 | length 2.8
  Top Layer w0.3: v1(35.45,45.75) 35.965,45.75 F8.1@36.325,45.39
  Bottom Layer w0.3: Q21.3@35.675,44.741 35.45,44.966 v1(35.45,45.75) ccw(c36.057,45.75) Q21.3@35.803,45.198
DO7: F9.1 Q11.3 | length 5.8
  Top Layer w0.3: v1(39.75,43.8) 40.175,44.225 ; F9.1@39.811,44.948 cw(c39.276,44.225) 40.175,44.225 ; F9.1@40.175,45.44 40.175,44.225 ; F9.1@40.539,44.948 ccw(c41.074,44.225) 40.175,44.225
  Bottom Layer w0.3: Q11.3@39.49,44.318 cw(c39.096,43.796) v1@39.75,43.796 ; Q11.3@39.675,44.741 39.75,44.666 v1(39.75,43.8) ; v1@39.75,44.003 cw(c40.236,44.003) Q11.3@39.892,44.346 ; Q11.3@39.791,44.158 ccw(c40.171,44.056) v1@39.835,43.852
DO8: F10.1 Q17.3 | length 7.2
  Top Layer w0.3: v1@43.5,43.937 ccw(c43.353,44.19) 43.637,44.115 ; v1@43.55,43.792 cw(c44.649,43.792) F10.1@44.216,44.802 ; v1(43.55,43.85) 43.55,44.939 F10.1@43.975,45.365 ; 43.55,44.247 cw(c44.454,44.247) F10.1@44.098,45.078 ; F10.1@43.55,44.702 cw(c44.259,44.702) F10.1@43.98,45.353
  Bottom Layer w0.3: Q17.3@43.315,44.318 cw(c42.962,43.848) v1@43.55,43.848 ; Q17.3@43.5,44.741 43.55,44.691 v1(43.55,43.85) ; v1@43.55,43.943 cw(c44.121,43.943) Q17.3@43.717,44.346 ; Q17.3@43.604,44.145 ccw(c43.917,44.062) v1@43.637,43.9
DO9: F11.1 Q23.3 | length 3.8
  Top Layer w0.4: F11.1@47.775,45.39 v1(47.775,46.2) ccw(c48.149,46.2) F11.1@48.139,45.826
  Bottom Layer w0.4: Q23.3@47.593,45.101 ccw(c47.154,45.54) 47.775,45.54 ccw(c48.396,45.54) Q23.3@47.957,45.101 ; Q23.3@47.775,44.741 v1(47.775,46.2)
DO10: F12.1 Q10.3 | length 9.9
  Top Layer w0.2: Q10.3@57.25,40.934 Q10.3@57.25,41.075
  Top Layer w0.4: F12.1@52.3,44.653 cw(c52.3,43.296) 53.259,44.255 cw(c54.219,45.215) F12.1@52.862,45.215 ; F12.1@52.3,45.215 56.44,41.075 Q10.3@57.25,41.075 ; 56.541,41.075 ccw(c56.541,41.82) Q10.3@57.068,41.293 ; 56.717,41.075 cw(c56.717,40.578) Q10.3@57.068,40.93
GND: C1.1 C2.2 C3.1 C5.2 C6.2 C7.2 C8.2 C9.2 CT1.2 D2.1 D2.2 D2.3 D3.1 D3.2 D3.3 D4.1 D4.2 D4.3 D5.1 D6.1 D6.2 D6.3 D29.1 DO11.1 DO12.1 GND1.1 J1.3 LS1.1 P1.10 Q4.2 Q5.2 Q6.2 Q7.2 Q12.2 Q13.2 Q14.2 Q18.2 Q19.2 Q22.2 R8.1 R15.2 R16.2 R17.2 R21.2 R30.2 R31.2 R32.2 R42.2 R43.2 R46.2 T1.1 T2.1 U1.5 U2.2 U2.3 U2.6 U2.9 U3.12 U4.1 | length 632.2
  Top Layer w0.3: v1@9.002,43.272 9.75,42.525 12.25,42.525 R15.2@13.15,41.625 ; v1@9.125,43.35 ccw(c9.608,43.35) 9.266,43.009 ; 12.382,42.393 cw(c11.614,41.625) R15.2@12.7,41.625 ; R15.2@12.744,42.031 ccw(c13,42.287) R15.2@13,41.925 ; C3.1@24.213,31.487 ccw(c22.976,32.724) 24.725,32.724 ; C3.1@24.425,31.275 ccw(c23.701,31.999) 24.725,31.999 ; C3.1@24.725,31.225 24.725,35.8 v1(24.75,35.825) ; 24.725,35.523 cw(c25.052,35.523) v1@24.821,35.754 ; v1@45.775,35.725 cw(c45.775,34.518) 46.629,35.371 ; v1@45.775,36.025 cw(c45.775,35.542) 46.116,35.884 ; 46.175,35.825 50.1,31.9 50.1,28.571 C2.2@49.504,27.975 49.504,26.254 C1.1@48.575,25.325 v1(49.425,24.475) v1(49.425,21.1) ; C1.1@48.625,25.025 cw(c48.625,24.421) 49.052,24.848 ; C1.1@48.625,25.625 ccw(c48.625,26.229) 49.052,25.802 ; C2.2@49.071,27.542 cw(c48.027,26.498) 49.504,26.498 cw(c50.982,26.498) C2.2@49.937,27.542 ; C2.2@49.071,28.408 ccw(c46.588,30.891) 50.1,30.891 ; 49.172,24.728 cw(c49.77,25.325) 48.925,25.325 cw(c49.77,25.325) 49.172,25.922 ; C2.2@49.283,28.196 ccw(c47.312,30.167) 50.1,30.167 ; C2.2@49.496,27.983 ccw(c48.036,29.443) 50.1,29.443 ; C2.2@49.708,27.771 ccw(c48.76,28.719) C2.2@50.1,28.719 ; v1(52.15,25.125) J1.3@54.775,25.125 ; J1.3@54.307,24.807 ccw(c53.539,24.039) 53.539,25.125 ccw(c53.539,26.211) J1.3@54.307,25.443 ; U2.9@59.751,7.546 ccw(c60.203,7.499) U2.9@59.851,7.212 ; U2.9@59.912,7.601 cw(c58.696,6.078) 60.645,6.078 ; U2.9@59.935,7.426 cw(c59.892,7.138) U2.9@60.126,7.311 ; U2.9@60.007,7.717 cw(c59.834,7.135) U2.9@60.368,7.424 ; U2.9@60.049,7.515 ccw(c61.222,7.394) 60.307,6.65 ; U2.9@60.099,7.836 cw(c59.193,6.701) 60.645,6.701 ; U2.2@60.645,4.875 U2.9@60.645,7.24 ; U2.9@60.645,6.825 cw(c61.18,6.825) U2.9@60.802,7.203 ; U2.9@61.28,7.875 64.15,7.875 ; U2.9@61.758,7.203 cw(c61.38,6.825) U2.9@61.915,6.825 ; U2.9@61.758,8.547 ccw(c61.38,8.925) U2.9@61.915,8.925 ; U2.6@61.809,10.069 cw(c61.553,9.813) 61.915,9.813 cw(c62.277,9.813) U2.6@62.021,10.069 ; U2.6@61.809,11.681 ccw(c61.553,11.937) 61.915,11.937 ccw(c62.277,11.937) U2.6@62.021,11.681 ; U2.3@61.915,4.875 U2.9@61.915,7.24 ; 61.915,6.078 cw(c63.864,6.078) U2.9@62.648,7.601 ; 61.915,6.701 cw(c63.367,6.701) U2.9@62.461,7.836 ; U2.9@61.915,8.51 U2.6@61.915,10.875 ; 61.915,9.032 ccw(c63.332,9.032) U2.9@62.461,7.914 ; 61.915,9.646 ccw(c63.811,9.646) U2.9@62.645,8.151 ; U2.6@61.915,10.261 ccw(c64.29,10.261) U2.9@62.83,8.388 ; U2.6@61.915,11.67 cw(c65.27,11.67) CT1.2@62.898,14.042 ; 61.915,12.394 cw(c64.546,12.394) CT1.2@62.686,14.254 ; 61.915,13.118 cw(c63.822,13.118) CT1.2@62.473,14.467 ; 61.915,13.842 cw(c63.098,13.842) CT1.2@62.261,14.679 ; CT1.2@61.943,14.156 cw(c61.782,14.058) 61.915,13.925 ; U2.6@62.016,9.883 cw(c62.293,9.957) U2.6@62.045,10.1 ; 62.044,9.779 ccw(c61.621,9.666) 61.84,10.045 cw(c61.35,9.196) 62.297,9.45 ; CT1.2@62.146,13.953 ccw(c62.048,13.792) 61.915,13.925 ; CT1.2@62.465,14.475 61.915,13.925 ; U2.9@62.98,7.529 cw(c63.607,7.135) 63.607,7.875 cw(c63.607,8.615) U2.9@62.98,8.221 ; U2.9@63.014,8.624 cw(c64.769,10.875) U2.6@61.915,10.875 ; U2.9@63.234,7.369 cw(c64.15,6.793) 64.15,7.875 ; U2.9@63.234,8.381 ccw(c64.15,8.957) 64.15,7.875 ; R8.1@63.425,2.075 64.225,2.075 64.7,2.55 64.7,7.325 64.15,7.875 ; R8.1@63.687,1.863 cw(c64.199,1.351) 64.199,2.075 cw(c64.199,2.799) R8.1@63.687,2.287 ; U2.6@61.915,10.875 61.915,13.925
  Top Layer w0.4: 2.098,26.831 ccw(c1.139,27.791) C8.2@2.495,27.791 ; C6.2@2.666,14.204 ccw(c1.099,15.771) 3.315,15.771 ; C6.2@2.752,12.685 cw(c2.102,11.802) 3.198,11.802 ; C8.2@2.768,28.751 ccw(c1.92,29.773) 3.248,29.773 ; C6.2@2.949,13.921 ccw(c2.065,14.805) 3.315,14.805 ; U4.1@3.032,16.984 cw(c2.349,16.301) 3.315,16.301 cw(c4.281,16.301) U4.1@3.598,16.984 ; U4.1@3.032,18.55 ccw(c2.349,19.233) 3.315,19.233 ccw(c4.281,19.233) U4.1@3.598,18.55 ; C8.2@3.09,27.055 ccw(c2.841,25.892) 2,26.733 ; C6.2@3.198,13.481 3.198,11.802 ; C6.2@3.315,13.598 U4.1@3.315,17.767 3.315,19.985 2,21.3 2,26.733 ; 3.315,15.206 ccw(c4.732,15.206) C6.2@3.73,14.204 ; C6.2@3.644,12.685 ccw(c4.294,11.802) 3.198,11.802 ; C8.2@3.728,28.751 cw(c4.576,29.773) 3.248,29.773 ; LS1.1@4.326,8.686 ccw(c3.301,9.71) 4.75,9.71 ccw(c6.199,9.71) LS1.1@5.174,8.686 ; LS1.1@5.174,7.637 cw(c6.199,6.613) 6.199,8.061 cw(c6.199,9.51) LS1.1@5.174,8.486 ; 7.805,8.061 cw(c7.805,4.105) D29.1@10.603,6.903 ; 8.771,8.061 cw(c8.771,5.071) D29.1@10.885,7.185 ; 9.284,30.15 cw(c9.284,28.834) v1@10.215,29.765 ; 9.736,8.061 cw(c9.736,6.036) D29.1@11.168,7.468 ; C7.2@9.998,12.473 cw(c9.571,12.046) 10.175,12.046 cw(c10.779,12.046) C7.2@10.352,12.473 ; C9.2@10.073,28.927 ccw(c9.646,29.354) 10.25,29.354 ccw(c10.854,29.354) C9.2@10.427,28.927 ; C7.2@10.175,12.7 10.175,11.75 v1(10.225,11.7) ; C9.2@10.25,28.7 v1(10.25,29.8) ; v1@10.285,29.765 cw(c11.216,28.834) 11.216,30.15 ; D29.1@11,7.3 10.239,8.061 LS1.1@4.75,8.061 4.75,10.25 3.198,11.802 ; DO11.1@11.075,37.725 v1(12.275,36.525) cw(c12.743,36.993) DO11.1@12.158,37.302 ; DO11.1@11.075,37.875 11.075,38.175 13.025,40.125 ; DO11.1@11.45,36.875 cw(c11.45,35.728) v1@12.261,36.539 ; DO11.1@11.45,38.975 ccw(c11.45,40.001) 12.176,39.276 ; DO11.1@11.85,38.184 cw(c13.603,38.223) 12.363,39.463 ; DO11.1@12.25,38.193 cw(c14.898,38.252) 13.025,40.125 ; v1(12.675,30.125) 12.65,30.15 3.625,30.15 ; R15.2@12.873,41.448 cw(c12.507,41.082) 13.025,41.082 ; T2.1@13.025,24.45 13.025,24.025 16.525,27.525 ; 13.025,40.961 cw(c13.714,40.961) R15.2@13.227,41.448 ; R15.2@13.15,41.625 13.025,41.5 13.025,40.125 ; T2.1@13.477,24.968 ccw(c13.477,26.153) 14.315,25.315 ; T2.1@13.62,24.025 cw(c15.056,24.025) T2.1@14.041,25.041 ; T2.1@14.02,24.025 cw(c16.422,24.025) 14.724,25.724 ; T2.1@14.42,24.025 cw(c17.788,24.025) 15.406,26.406 ; v1(15.225,33.35) 15.225,31.3 v1(14.725,30.8) 16.525,29 16.525,27.525 ; v1(15.25,35.8) 15.275,35.825 v1(20.775,35.825) v1(24.75,35.825) ; U1.5@18.665,27.525 16.525,27.525 ; v1(26.4,35.85) 28.675,35.85 v1(28.7,35.875) ; T1.1@26.7,24 T1.1@26.7,24.025 ; v1(28.375,40.05) 28.375,40.625 29.3,41.55 29.3,42.8 30.15,43.65 32.175,43.65 32.4,43.425 v1(32.4,40.65) ; GND1.1@34.898,4.445 cw(c34.412,3.361) v1@35.6,3.361 ; GND1.1@35.061,4.81 cw(c34.689,3.978) 35.6,3.978 ; v1(35.525,35.825) 46.175,35.825 ; GND1.1@35.55,5.425 35.6,5.375 v1(35.6,3.4) ; 35.6,4.149 cw(c36.251,4.149) GND1.1@35.791,4.609 ; v1(41.875,2.125) 43.025,0.975 47.675,0.975 50.075,3.375 v1(51.6,3.375) ; v1(46.647,39.777) 46.647,43.047 46.95,43.35 53,43.35 54.125,42.225 54.125,40.625 DO12.1@56.95,37.8 v1@56.95,39.325 ; D5.1@52.585,2.848 ccw(c51.6,2.192) v1(51.6,3.375) ; D5.1@52.585,3.902 cw(c51.6,4.558) v1(51.6,3.375) ; D5.1@53.764,2.986 cw(c54.703,2.047) 54.703,3.375 cw(c54.703,4.703) D5.1@53.764,3.764 ; D5.1@54.047,2.703 cw(c55.669,1.081) 55.669,3.375 cw(c55.669,5.669) D5.1@54.047,4.047 ; 55.158,39.592 ccw(c56.95,41.385) DO12.1@56.95,38.85 ; 55.761,38.989 cw(c54.822,38.05) DO12.1@56.15,38.05 ; 55.84,38.91 ccw(c56.95,40.019) DO12.1@56.95,38.45 ; v1(56.2,3.375) D5.1@53.375,3.375 v1(51.6,3.375) ; DO12.1@56.602,38.77 ccw(c56.334,39.325) v1@56.95,39.325 ; v1(56.975,39.35) v1@56.95,39.325 ; v1@57.25,47.218 ccw(c57.419,47.511) 57.507,47.185 ; DO12.1@57.298,38.77 cw(c57.566,39.325) v1@56.95,39.325 ; v1@57.363,47.175 cw(c57.363,46.477) Q6.2@57.856,46.971 ; v1@57.471,47.175 ccw(c57.471,47.719) Q6.2@57.856,47.334 ; Q6.2@58.575,46.971 cw(c59.014,46.532) 59.014,47.153 cw(c59.014,47.773) Q6.2@58.575,47.334 ; 59.765,47.153 cw(c59.765,46.54) R17.2@60.198,46.973 ; 59.777,47.153 ccw(c59.777,47.748) R17.2@60.198,47.327 ; R17.2@60.372,47.153 Q6.2@58.216,47.153 58.193,47.175 v1(57.225,47.175) 55.975,48.425 5.75,48.425 3.625,46.3 3.625,30.15 ; CT1.2@62.068,14.872 ccw(c61.108,15.832) 62.465,15.832 ccw(c63.822,15.832) CT1.2@62.862,14.872 ; CT1.2@62.465,14.475 62.465,22.215 64.575,24.325 64.575,39.5 v1(62.625,41.45) ; 2,26.733 C8.2@3.248,27.981 3.248,29.773 ; 3.248,29.773 3.625,30.15
  Top Layer w0.5: 60.625,3.15 60.645,3.17 U2.2@60.645,4.875 ; 61.915,3.365 U2.3@61.915,4.875
  Top Layer w0.6: T2.1@13.025,24.45 16.025,21.45 24.15,21.45 T1.1@26.7,24 ; T2.1@13.477,23.182 cw(c13.477,21.212) 14.87,22.605 ; T2.1@14.32,24.025 ccw(c16.42,24.025) 14.935,22.54 ; 25.026,22.326 ccw(c23.328,24.025) T1.1@25.73,24.025 ; 25.393,22.693 cw(c26.573,21.514) T1.1@26.573,23.182 ; P1.10@34.012,10.152 34.012,7.188 ; GND1.1@34.528,5.744 ccw(c32.745,5.921) 34.012,7.188 ; 34.542,6.658 ccw(c35.225,7.341) GND1.1@35.225,6.375 ; GND1.1@35.55,5.425 35.55,5.65 34.012,7.188
  Bottom Layer w0.2: Q7.2@38.57,37.879 cw(c37.954,37.263) 38.825,37.263 ; R21.2@38.578,36.122 ccw(c37.98,36.72) 38.825,36.72 ccw(c39.67,36.72) R21.2@39.072,36.122 ; Q7.2@38.822,38.309 38.825,38.307 R21.2@38.825,35.825 ; 38.825,37.275 cw(c39.679,37.275) Q7.2@39.075,37.879
  Bottom Layer w0.3: U3.12@47.95,21.075 49.4,21.075 v1(49.425,21.1) ; 49.123,21.075 ccw(c49.123,21.402) v1@49.354,21.171 ; v1(49.425,24.475) 49.425,24.5 50.05,25.125 v1(52.15,25.125) ; v1@49.525,24.475 cw(c49.827,24.475) 49.613,24.688
  Bottom Layer w0.4: D3.3@3.165,17.587 cw(c2.567,16.99) 3.412,16.99 cw(c4.257,16.99) D3.3@3.66,17.587 ; D2.3@3.165,42.512 cw(c2.567,41.915) 3.412,41.915 cw(c4.257,41.915) D2.3@3.66,42.512 ; D3.3@3.412,18.485 3.412,15.838 3.8,15.45 8.525,15.45 10.225,13.75 v1(10.225,11.7) 10.225,9.45 8.836,8.061 LS1.1@4.75,8.061 ; D2.3@3.412,43.41 3.412,41.288 4.325,40.375 5,40.375 ; D3.2@4.778,17.587 cw(c4.18,16.99) 5.025,16.99 cw(c5.87,16.99) D3.2@5.272,17.587 ; D2.2@4.778,42.512 cw(c4.18,41.915) 5.025,41.915 cw(c5.87,41.915) D2.2@5.272,42.512 ; 5.025,15.525 D3.2@5.025,18.485 ; D2.2@5.025,43.41 5.025,40.4 5,40.375 ; LS1.1@5.174,7.637 cw(c6.199,6.613) 6.199,8.061 cw(c6.199,9.51) LS1.1@5.174,8.486 ; D3.1@6.39,17.587 cw(c5.793,16.99) 6.638,16.99 cw(c7.483,16.99) D3.1@6.885,17.587 ; D2.1@6.39,42.512 cw(c5.793,41.915) 6.638,41.915 cw(c7.483,41.915) D2.1@6.885,42.512 ; 6.6,40.375 5,40.375 ; 6.638,15.512 D3.1@6.638,18.485 ; 6.638,40.337 D2.1@6.638,43.41 8.965,43.41 v1(9.025,43.35) ; D2.1@6.885,43.162 cw(c7.483,42.565) 7.483,43.41 cw(c7.483,44.255) D2.1@6.885,43.657 ; 8.76,43.41 cw(c8.76,43.085) v1@8.99,43.315 ; v1(12.275,36.525) 13,35.8 v1(15.25,35.8) 15.25,33.375 v1(15.225,33.35) ; v1(12.675,30.125) 14.025,30.125 14.725,30.825 v1(14.725,30.8) ; v1@15.275,35.825 R30.2@17.6,35.825 ; R30.2@17.423,35.648 ccw(c16.996,35.221) 16.996,35.825 ccw(c16.996,36.429) R30.2@17.423,36.002 ; R30.2@17.423,36.052 ccw(c16.942,36.533) 17.623,36.533 ; Q12.2@17.441,37.95 cw(c17.002,37.511) 17.623,37.511 cw(c18.243,37.511) Q12.2@17.804,37.95 ; R30.2@17.623,35.848 Q12.2@17.623,38.309 ; 17.623,36.424 ccw(c18.149,36.424) R30.2@17.777,36.052 ; v1(20.775,35.825) R42.2@21.525,35.825 ; Q18.2@21.341,37.95 cw(c20.902,37.511) 21.522,37.511 cw(c22.143,37.511) Q18.2@21.704,37.95 ; R42.2@21.348,35.648 ccw(c20.921,35.221) 20.921,35.825 ccw(c20.921,36.429) R42.2@21.348,36.002 ; R42.2@21.348,36.052 ccw(c20.927,36.473) 21.522,36.473 ; R42.2@21.522,35.828 Q18.2@21.522,38.309 ; 21.522,36.485 ccw(c22.135,36.485) R42.2@21.702,36.052 ; v1(24.75,35.825) R16.2@25.5,35.825 ; Q5.2@25.316,37.95 cw(c24.877,37.511) 25.498,37.511 cw(c26.118,37.511) Q5.2@25.679,37.95 ; R16.2@25.323,35.648 ccw(c24.896,35.221) 24.896,35.825 ccw(c24.896,36.429) R16.2@25.323,36.002 ; R16.2@25.323,36.052 ccw(c24.902,36.473) 25.498,36.473 ; 25.498,36.485 ccw(c26.11,36.485) R16.2@25.677,36.052 ; Q5.2@25.498,38.309 25.498,35.828 R16.2@25.5,35.825 ; R16.2@25.677,35.648 cw(c26.104,35.221) 26.104,35.825 cw(c26.104,36.429) R16.2@25.677,36.002 ; v1(26.4,35.85) 26.375,35.825 R16.2@25.5,35.825 ; v1(28.375,40.05) 28.375,39.507 Q13.2@29.573,38.309 29.573,35.853 R31.2@29.6,35.825 ; v1(28.7,35.875) R31.2@29.55,35.875 ; 28.83,39.052 ccw(c29.573,39.795) Q13.2@29.573,38.744 ; Q13.2@29.391,37.95 cw(c28.952,37.511) 29.573,37.511 cw(c30.193,37.511) Q13.2@29.754,37.95 ; R31.2@29.423,35.698 ccw(c28.996,35.271) 28.996,35.875 ccw(c28.996,36.479) 29.423,36.052 ccw(c29.063,36.412) 29.573,36.412 ; 29.573,36.545 ccw(c30.27,36.545) R31.2@29.777,36.052 ; v1@32.4,40.6 cw(c32.4,40.282) 32.625,40.507 ; v1(32.4,40.65) 32.482,40.65 Q19.2@34.823,38.309 ; 34.168,38.964 cw(c33.691,38.487) Q19.2@34.365,38.487 ; Q19.2@34.221,38.911 ccw(c34.623,39.312) 34.623,38.744 ccw(c34.623,39.461) v1@35.129,38.954 ; Q19.2@34.441,37.95 cw(c33.519,37.028) 34.823,37.028 ; R43.2@34.448,36.052 ccw(c33.545,36.955) 34.823,36.955 ; R43.2@34.802,35.648 cw(c35.229,35.221) 35.229,35.825 cw(c35.229,36.429) R43.2@34.802,36.002 ; Q19.2@34.88,38.487 cw(c35.405,38.487) Q19.2@35.033,38.859 ; Q19.2@35.019,38.834 cw(c35.331,38.654) v1@35.238,39.002 ; v1(35.225,39.05) 34.823,38.648 Q19.2@34.823,38.309 ; v1(35.525,35.825) 34.8,35.825 34.823,35.848 Q19.2@34.823,38.309 ; v1(35.6,3.4) 40.6,3.4 v1(41.875,2.125) ; R21.2@38.825,35.825 v1(39.575,35.825) ; R21.2@39.002,35.648 cw(c39.429,35.221) 39.429,35.825 cw(c39.429,36.429) R21.2@39.002,36.002 ; Q14.2@42.516,37.95 cw(c42.077,37.511) 42.698,37.511 cw(c43.318,37.511) Q14.2@42.879,37.95 ; R32.2@42.698,35.903 Q14.2@42.698,38.309 ; 42.698,36.666 ccw(c43.566,36.666) R32.2@42.952,36.052 ; R32.2@42.775,35.825 v1(43.425,35.825) ; R32.2@42.952,35.648 cw(c43.379,35.221) 43.379,35.825 cw(c43.379,36.429) R32.2@42.952,36.002 ; v1(45.775,35.825) R46.2@46.65,35.825 46.647,35.828 Q22.2@46.647,38.309 v1(46.647,39.777) ; Q22.2@46.466,37.95 cw(c46.027,37.511) 46.647,37.511 cw(c47.268,37.511) Q22.2@46.829,37.95 ; Q22.2@46.466,38.669 ccw(c46.027,39.108) 46.647,39.108 ccw(c47.268,39.108) Q22.2@46.829,38.669 ; R46.2@46.473,35.648 ccw(c46.046,35.221) 46.046,35.825 ccw(c46.046,36.429) R46.2@46.473,36.002 ; R46.2@46.473,36.052 ccw(c46.052,36.473) 46.647,36.473 ; 46.647,36.485 ccw(c47.26,36.485) R46.2@46.827,36.052 ; C5.2@51.158,7.916 cw(c50.092,6.85) 51.6,6.85 ; v1(51.6,3.375) 51.6,8.167 C5.2@51.881,8.448 ; 51.6,6.413 cw(c53.726,6.413) C5.2@52.223,7.916 ; 51.6,7.378 cw(c52.76,7.378) C5.2@51.94,8.199 ; v1(56.2,3.375) 59.35,3.375 59.95,3.975 v1(59.95,7.525) ; v1(56.975,39.35) 57.95,40.325 61.525,40.325 62.638,41.438 D4.1@62.638,43.435 62.638,45.062 62.35,45.35 59.425,45.35 59.238,45.163 ; v1(57.225,47.175) 59.238,45.163 ; D6.3@59.165,17.512 cw(c58.567,16.915) 59.412,16.915 cw(c60.257,16.915) D6.3@59.66,17.512 ; D6.3@59.412,18.41 59.412,16.663 59.85,16.225 62.513,16.225 ; D4.3@59.412,43.435 59.238,43.609 59.238,45.163 ; D4.3@59.628,44.36 cw(c60.257,45.162) 59.238,45.162 ; D6.2@60.778,17.512 cw(c60.18,16.915) 61.025,16.915 cw(c61.87,16.915) D6.2@61.272,17.512 ; D4.2@60.778,44.332 ccw(c60.18,44.93) 61.025,44.93 ccw(c61.87,44.93) D4.2@61.272,44.332 ; 61.025,16.275 D6.2@61.025,18.41 ; D4.2@61.025,43.435 61.025,45.3 ; CT1.2@62.068,14.872 ccw(c60.993,15.947) 62.513,15.947 ; D6.1@62.39,17.512 cw(c61.793,16.915) 62.638,16.915 cw(c63.483,16.915) D6.1@62.885,17.512 ; D4.1@62.39,42.537 cw(c61.793,41.94) 62.638,41.94 cw(c63.483,41.94) D4.1@62.885,42.537 ; D4.1@62.39,44.332 ccw(c61.793,44.93) 62.638,44.93 ccw(c63.483,44.93) D4.1@62.885,44.332 ; CT1.2@62.465,14.475 62.513,14.523 62.513,16.225 ; 62.513,15.716 ccw(c63.706,15.716) CT1.2@62.862,14.872 ; D6.1@62.638,18.41 62.638,16.35 62.513,16.225
  Bottom Layer w0.6: P1.10@34.012,10.152 36.773,10.152
  other v1: 64.825,1.725 38.775,2.55 42.5,2.875 25.275,3.1 2.825,5.625 42.3,7.15 16.7,8.725 64.775,8.975 6.35,10.125 30.775,13.125 14.625,13.75 64.75,14.5 40.45,19.95 64.75,20.775 12.05,21.45 36,25.225 16.775,25.725 27.05,28.525 18.6,29.575 5.125,32.425 7.35,39.6 4.75,39.625 41.85,40.375 50.1,45.075 45.6,45.125 10.125,46.175 59.125,46.2 32.525,46.25 64.725,50.975 1.5,51.2 29.075,54.825 37.05,54.9 1.475,56.7 64.725,56.975